# Altium PCB PCB1.PcbDoc
Units mil, origin at the board's own origin, x right, y up, seen from the top; angles counter-clockwise.
Board outline 4000 x 3524 mil, 2 copper layers (Top Layer, Bottom Layer); 94 components, 52 nets, 245 pads, 42 vias.
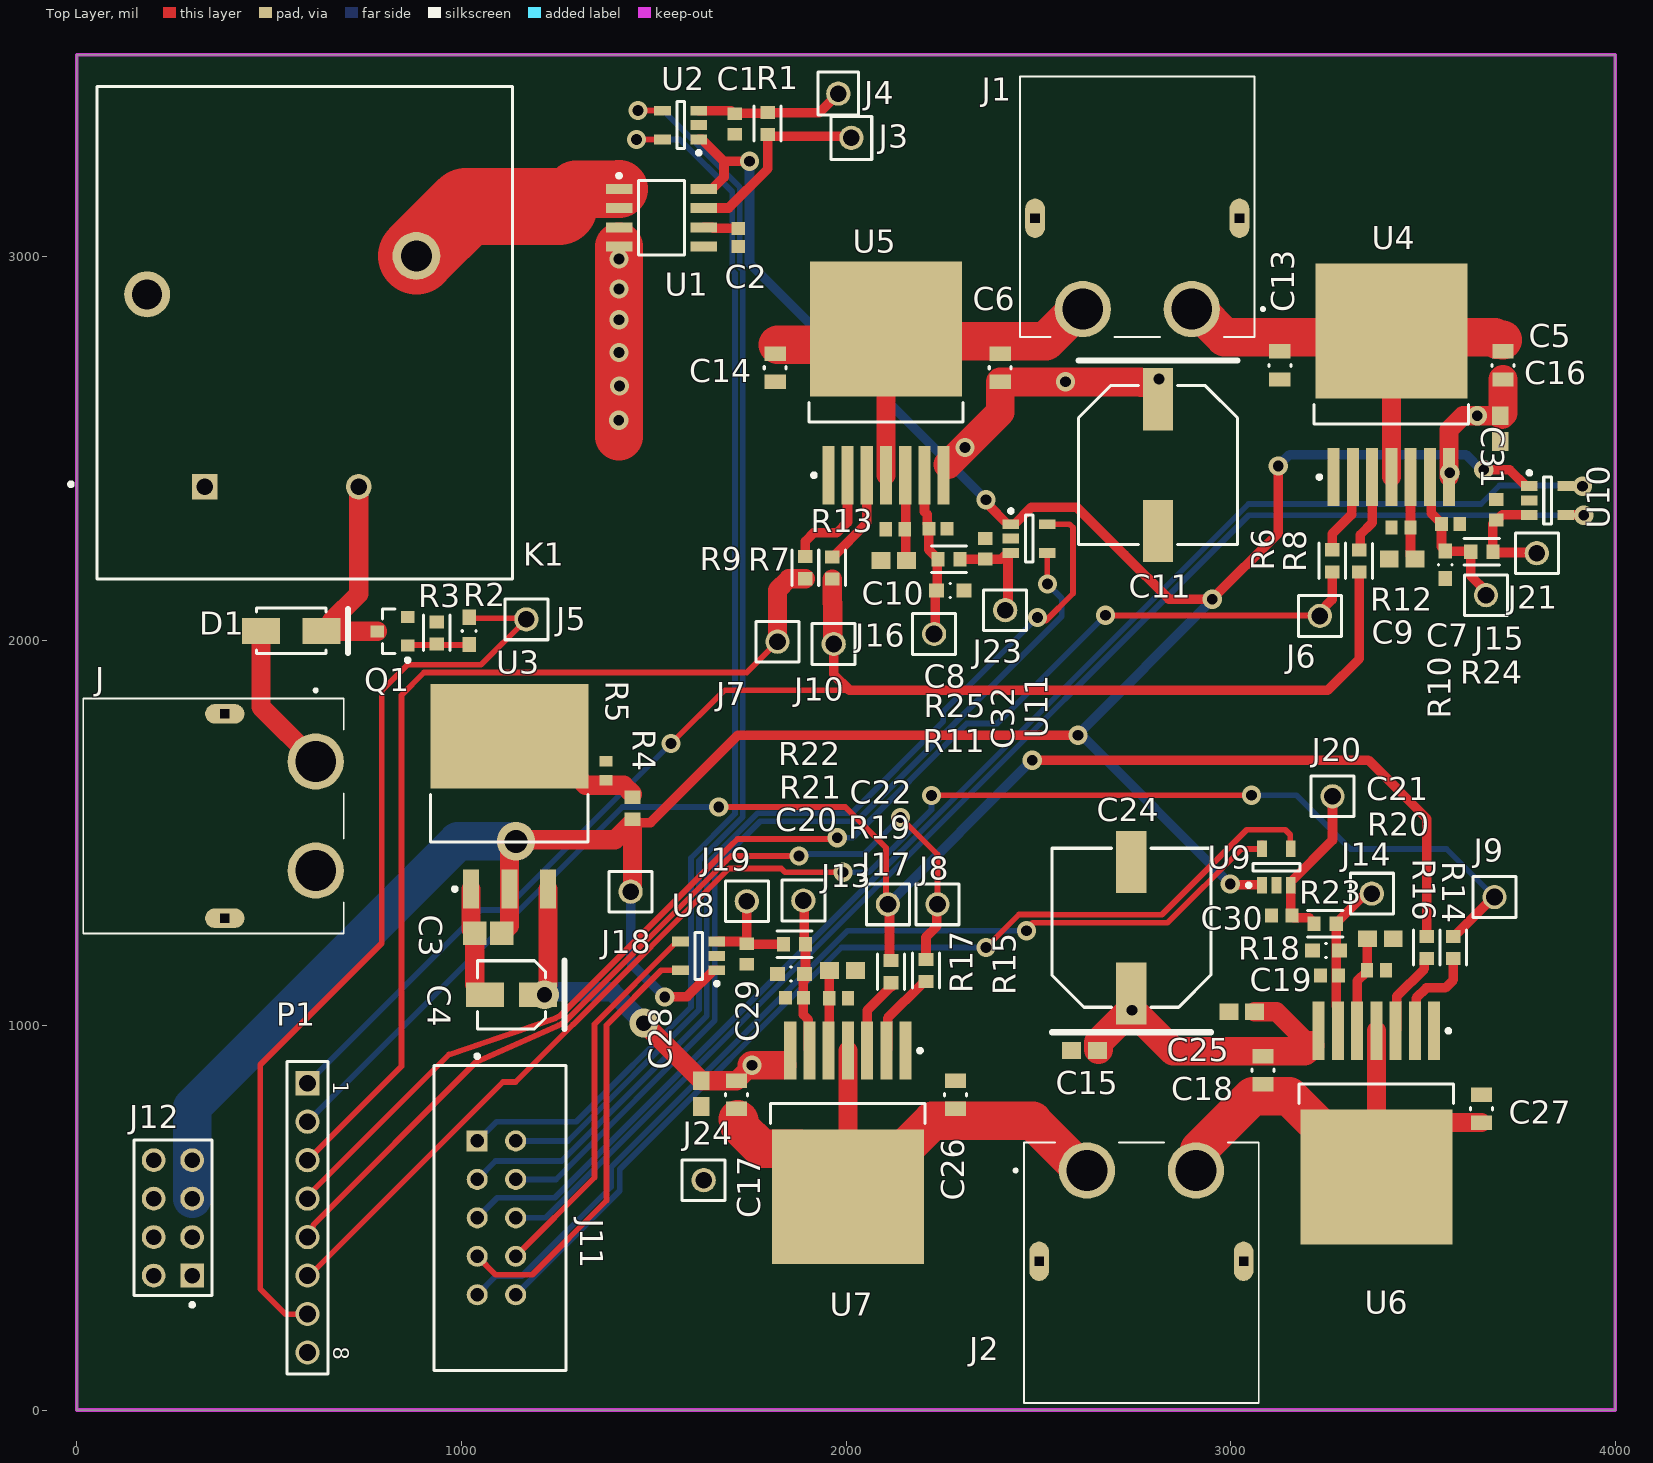
[diagram p0: Top Layer view]
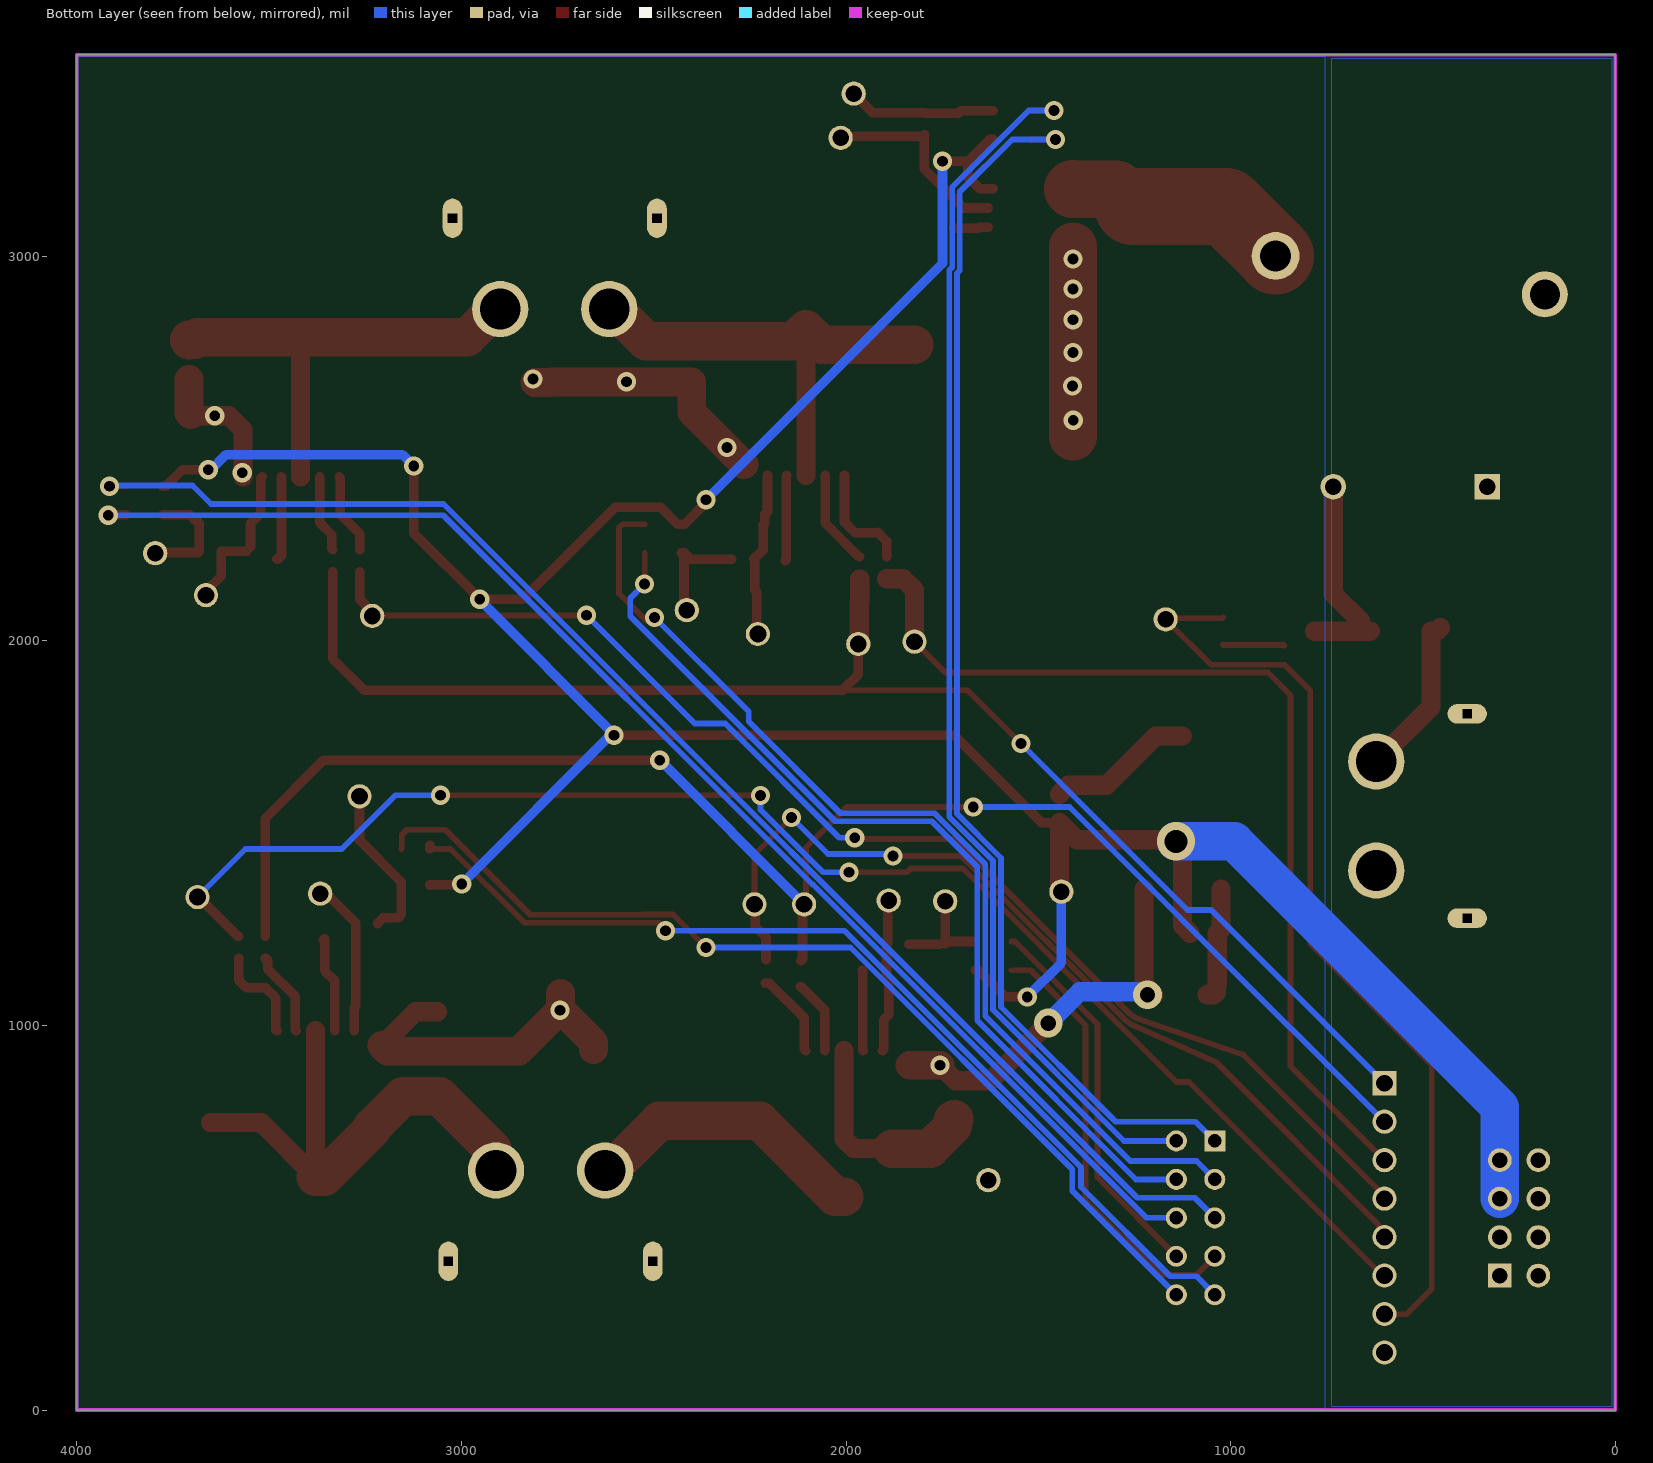
[diagram p1: Bottom Layer view, seen from below]

## Layer stack, top to bottom
Top Solder: solder mask 0.4, Solder Resist, Dk 3.5
Top Layer: signal copper 1.4
Dielectric 1: dielectric 12.6, FR-4, Dk 4.8
Bottom Layer: signal copper 1.4
Bottom Solder: solder mask 0.4, Solder Resist, Dk 3.5

## Board outline
0,0 0,3524 4000,3524 4000,0

## Design rules (kind name [scope] priority, off if disabled: settings)
Clearance [All] p1: gap=5 ignorepadtopadclearanceinfootprint=FALSE except(0: Arc-Hole Track-Hole SMDPad-Hole THPad-Hole Via-Hole Fill-Hole Poly-Hole Region-Hole Text-Hole; 7.87: Arc-SMDPad Track-SMDPad; 10: Arc-Via Track-Via Via-Via; 13: Arc-THPad Track-THPad; 21.26: SMDPad-THPad THPad-THPad)
HoleSize [All] p1: absolutevalues=TRUE maxlimit=248.03 minlimit=7.87 maxpercent=80.000 minpercent=20.000
HoleToHoleClearance [All] p1: gap=21.26 allowstackedmicrovias=TRUE
MinimumAnnularRing [All] p1: minimumring=5.12
PolygonConnect [All] p1: connectstyle=Relief reliefconductorwidth=10 reliefentries=4 polygonreliefangle="90 Angle" airgapwidth=10
RoutingVias [All] p1: holewidth=28 width=50 viastyle="Through Hole" minholewidth=11.81 minwidth=23.62 maxholewidth=250 maxwidth=250
SolderMaskExpansion [All] p1: expansion=4 istentingtop=FALSE
Width [All] p1: maxlimit=200 minlimit=10 preferedwidth=15 minimp=50.000000 maximp=50.000000 favimp=50.000000
28 further rules are at their usual default settings.

## Components (designator, comment, footprint, x,y, rotation, side; value= is the part's Value field where it differs from the comment)
C1 "GRM188R60J106ME47D" CAPC1608X90X35NL10T15 1711,3344 r90 top
C2 "1nF" CAPC1608X95X40LL15T15 1720,3049 r90 top
C3 "TAJP106M010RNJ" CAPC2113X120X50ML20T30 1070,1239.87 r0 top
C4 "EEE-FK1V100UR" PNSC-FK-V-B_V 1130,1079.87 r180 top
C5 "CC0805KRX7R7BB224" FP-CC0805-0_85-MFG 3708,2716.24 r90 top value="220 nF"
C6 "CC0805KRX7R7BB224" FP-CC0805-0_85-MFG 2401,2710 r90 top value="220 nF"
C7 "1nF" CAPC1608X95X40LL15T15 3572,2304 r180 top
C8 "1nF" CAPC1608X95X40LL15T15 2239,2292 r180 top
C9 "0603YC104KAZ2A" CAPC1608X90X35ML15T15 3446,2213 r0 top
C10 "0603YC104KAZ2A" CAPC1608X90X35ML15T15 2124,2209 r0 top
C11 "EEEFP1E471AP" PNSC-FP-V-G_V 2811,2457 r270 top
C13 "CC0805KRX7R7BB224" FP-CC0805-0_85-MFG 3128,2716.24 r270 top value="220 nF"
C14 "CC0805KRX7R7BB224" FP-CC0805-0_85-MFG 1816,2710 r270 top value="220 nF"
C15 "0603YC104KAZ2A" CAPC1608X90X35ML15T15 2620,935 r180 top
C16 "0603YC104KAZ2A" CAPC1608X90X35ML15T15 3701,2552 r270 top
C17 "CC0805KRX7R7BB224" FP-CC0805-0_85-MFG 1715,819.76 r270 top value="220 nF"
C18 "CC0805KRX7R7BB224" FP-CC0805-0_85-MFG 3084,884 r270 top value="220 nF"
C19 "1nF" CAPC1608X95X40LL15T15 3257,1130 r0 top
C20 "1nF" CAPC1608X95X40LL15T15 1866,1072 r0 top
C21 "0603YC104KAZ2A" CAPC1608X90X35ML15T15 3389.46,1226 r180 top
C22 "0603YC104KAZ2A" CAPC1608X90X35ML15T15 1991,1143 r180 top
C24 "EEEFP1E471AP" PNSC-FP-V-G_V 2742,1254.26 r90 top
C25 "0603YC104KAZ2A" CAPC1608X90X35ML15T15 3029,1036 r180 top
C26 "CC0805KRX7R7BB224" FP-CC0805-0_85-MFG 2285,819.76 r90 top value="220 nF"
C27 "CC0805KRX7R7BB224" FP-CC0805-0_85-MFG 3652,784 r90 top value="220 nF"
C28 "0603YC104KAZ2A" CAPC1608X90X35ML15T15 1624,823 r270 top
C29 "GRM188R60J106ME47D" CAPC1608X90X35NL10T15 1742,1186 r90 top
C30 "GRM188R60J106ME47D" CAPC1608X90X35NL10T15 3133,1286 r0 top
C31 "GRM188R60J106ME47D" CAPC1608X90X35NL10T15 3691,2341 r270 top
C32 "GRM188R60J106ME47D" CAPC1608X90X35NL10T15 2362,2240 r270 top
D1 "B160-13-F" DIOD-B1X0-2_V 558,2026 r0 top
J "XT60PW-F" AMASS_XT60PW-F 621.22,1544.75 r270 top
J1 "XT60PW-F" AMASS_XT60PW-F 2757.25,2862.78 r180 top
J2 "XT60PW-F" AMASS_XT60PW-F 2768,623.22 r0 top
J3 "61300111121" 61300111121 2014,3308 r90 top
J4 "61300111121" 61300111121 1980,3423 r90 top
J5 "61300111121" 61300111121 1169,2056 r0 top
J6 "61300111121" 61300111121 3232,2065 r0 top
J7 "61300111121" 61300111121 1822,1998 r0 top
J8 "61300111121" 61300111121 2238,1315 r0 top
J9 "61300111121" 61300111121 3686,1334 r0 top
J10 "61300111121" 61300111121 1968,1992 r0 top
J11 "D2510-6002-AR" FP-D2510-6002-AR-MFG 1100,500 r270 top
J12 "HTSW-104-07-G-D" FP-HTSW-104-07-G-D-MFG 250,500 r90 top
J13 "61300111121" 61300111121 1889,1325 r0 top
J14 "61300111121" 61300111121 3367,1343 r0 top
J15 "61300111121" 61300111121 3664,2119 r0 top
J16 "61300111121" 61300111121 2229,2018 r0 top
J17 "61300111121" 61300111121 2109,1315 r0 top
J18 "61300111121" 61300111121 1440,1348 r0 top
J19 "61300111121" 61300111121 1742,1323 r0 top
J20 "61300111121" 61300111121 3265,1596 r0 top
J21 "61300111121" 61300111121 3796,2228 r0 top
J23 "61300111121" 61300111121 2414,2080 r0 top
J24 "61300111121" 61300111121 1630,598 r0 top
K1 "T9AS1D22-12" FP-T9AS1D22-12-MFG 593.04,2801.2 r0 top
P1 "61300811121" 61300811121 600,500 r270 top
Q1 "MMBT2222ALT1G" ONSC-SOT-23-3-318-08_V 821,2025 r180 top
R1 "MCT0603MD1002BP100" FP-MCT0603-IPC_B 1796,3345 r90 top
R2 "RP73PF1J1K0BTDF" FP-RP73P-1J-MFG 1020,2026 r270 top value=1KΩ
R3 "MCT0603MD1002BP100" FP-MCT0603-IPC_B 936,2021 r270 top
R4 "ERJ-3EKF1210V" RESC1608X55X30ML15T15 1445,1564.87 r270 top
R5 "365 ohm" RESC1608X55X30LL15T15 1376.1,1662.87 r270 top
R6 "MCT0603MD1002BP100" FP-MCT0603-IPC_B 3264,2208.28 r90 top
R7 "MCT0603MD1002BP100" FP-MCT0603-IPC_B 1894,2190.28 r90 top
R8 "MCT0603MD1002BP100" FP-MCT0603-IPC_B 3334,2208 r90 top
R9 "MCT0603MD1002BP100" FP-MCT0603-IPC_B 1964,2190 r90 top
R10 "RP73PF1J1K0BTDF" FP-RP73P-1J-MFG 3558,2198 r90 top value=1KΩ
R11 "RP73PF1J1K0BTDF" FP-RP73P-1J-MFG 2271,2131 r180 top value=1KΩ
R12 "CRCW0603510RFKEA" RESC1609X50X30NL10T20 3443,2295 r0 top
R13 "CRCW0603510RFKEA" RESC1609X50X30NL10T20 2128,2290 r0 top
R14 "MCT0603MD1002BP100" FP-MCT0603-IPC_B 3579,1203 r270 top
R15 "MCT0603MD1002BP100" FP-MCT0603-IPC_B 2208,1143 r270 top
R16 "MCT0603MD1002BP100" FP-MCT0603-IPC_B 3510,1203 r270 top
R17 "MCT0603MD1002BP100" FP-MCT0603-IPC_B 2117,1140 r270 top
R18 "RP73PF1J1K0BTDF" FP-RP73P-1J-MFG 3248,1195 r0 top value=1KΩ
R19 "CRCW0603510RFKEA" RESC1609X50X30NL10T20 1981,1071 r180 top
R20 "CRCW0603510RFKEA" RESC1609X50X30NL10T20 3379,1144 r180 top
R21 "RP73PF1J1K0BTDF" FP-RP73P-1J-MFG 1857,1134 r0 top value=1KΩ
R22 "MCT0603MD1002BP100" FP-MCT0603-IPC_B 1866,1211 r180 top
R23 "MCT0603MD1002BP100" FP-MCT0603-IPC_B 3246,1265 r180 top
R24 "MCT0603MD1002BP100" FP-MCT0603-IPC_B 3653,2232 r0 top
R25 "MCT0603MD1002BP100" FP-MCT0603-IPC_B 2268,2212 r0 top
U1 "ACS712ELCTR-30A-T" ALEG-LC-8_V 1520.04,3100.2 r270 top
U2 "MCP3221A7T-E/OT" SOT-23-OT5_N 1570,3341 r180 top
U3 "LM1084IS-5.0/NOPB" KTT0003B_L 1125,1597 r90 top
U4 "BTN8962TA" INF-PG-TO263-7-1_N 3418,2666.24 r90 top
U5 "BTN8962TA" INF-PG-TO263-7-1_N 2104,2671 r90 top
U6 "BTN8962TA" INF-PG-TO263-7-1_N 3379,746 r270 top
U7 "BTN8962TA" INF-PG-TO263-7-1_N 2005,694.76 r270 top
U8 "MCP3221A7T-E/OT" SOT-23-OT5_N 1617,1181 r180 top
U9 "MCP3221A7T-E/OT" SOT-23-OT5_N 3119,1412 r90 top
U10 "MCP3221A7T-E/OT" SOT-23-OT5_N 3824,2365 r0 top
U11 "MCP3221A7T-E/OT" SOT-23-OT5_N 2476,2266 r0 top

## Footprints (in the part's own frame and the unit in brackets; to place one, negate y for a bottom-side part, rotate by r counter-clockwise, add the part's x,y. Pads: shape width x height; smd on the part's side, far side on the other; paste and mask are expansions set on the pad)
61300111121 [mm] "Pin Header, pitch 2.54 mm, THT, Vertical, single row, 1p"
  round 1.6 hole 1.1: 1(0,0)
  silkscreen extent -1.42,-1.35 1.42,1.35, body extent -1.27,-1.27 1.27,1.27, height 8.57
61300811121 [mm] "Pin Header, pitch 2.54 mm, THT, Vertical, single row, 8p"
  rect 1.6x1.6 hole 1.1: 1(-8.89,0)
  round 1.6 hole 1.1: 2(-6.35,0) 3(-3.81,0) 4(-1.27,0) 5(1.27,0) 6(3.81,0) 7(6.35,0) 8(8.89,0)
  silkscreen extent -10.31,-1.35 10.31,1.35, body extent -10.16,-1.27 10.16,1.27, height 8.57
ALEG-LC-8_V [mm] "SOIC, 8-Leads, Body 4.9x3.9mm, Pitch 1.27mm"
  rect 0.65x1.75 smd: 1(-1.905,-2.8) 2(-0.635,-2.8) 3(0.635,-2.8) 4(1.905,-2.8) 5(1.905,2.8) 6(0.635,2.8) 7(-0.635,2.8) 8(-1.905,2.8)
  silkscreen extent -2.9,-2.92 2.45,1.53, body extent -2.45,-1.95 2.45,1.95, height 1.75
AMASS_XT60PW-F [mm]
  round 3.716 hole 2.7: 1(-3.6,0) 2(3.6,0)
  oval 1.3x2.6 hole 0.6 square: S1(-6.75,-6) S2(6.75,-6)
  silkscreen extent -8.4,-15.35 7.75,1.85
CAPC1608X90X35ML15T15 [mm] "Chip Capacitor, 2-Leads, Body 1.60x0.81mm, IPC Low Density"
  rect 1.25x1.1 smd: 1(-0.85,0) 2(0.85,0)
  body extent -0.88,-0.48 0.87,0.48, height 0.9
CAPC1608X90X35NL10T15 [mm] "Chip Capacitor, 2-Leads, Body 1.60x0.80mm, IPC Medium Density"
  rect 0.85x0.95 smd: 1(-0.675,0) 2(0.675,0)
  body extent -0.85,-0.45 0.85,0.45, height 0.9
CAPC1608X95X40LL15T15 [mm] "Chip Capacitor, 2-Leads, Body 1.60x0.80mm, IPC High Density"
  rect 0.85x0.9 smd: 1(-0.6,0) 2(0.6,0)
  body extent -0.87,-0.48 0.88,0.48, height 0.95
CAPC2113X120X50ML20T30 [mm] "Chip Capacitor, 2-Leads, Body 2.05x1.25mm, IPC Low Density"
  rect 1.55x1.55 smd: 1(-0.9,0) 2(0.9,0)
  body extent -1.13,-0.72 1.12,0.72, height 1.2
DIOD-B1X0-2_V [mm] "Molded Diode, 2-Leads, Body 4.6x2.92mm"
  rect 2.5x1.7 smd: 1(-2,0) 2(2,0)
  silkscreen extent -2.3,-1.5 3.75,1.5, body extent -2.3,-1.46 2.3,1.46, height 2.3
FP-CC0805-0_85-MFG [mm]
  rect 0.95x1.4 smd paste+0 mask+0: 1(-0.925,0) 2(0.925,0)
  silkscreen extent -0.08,-0.72 0.08,0.72, body extent -1.6,-1.05 1.6,1.05, height 0.25
FP-D2510-6002-AR-MFG [mm]
  rect 1.39x1.39 hole 0.89 paste-1000 mask+0: 1(-5.08,-1.495)
  round 1.39 hole 0.89 paste-1000 mask+0: 2(-5.08,1.045) 3(-2.54,-1.495) 4(-2.54,1.045) 5(0,-1.495) 6(0,1.045) 7(2.54,-1.495) 8(2.54,1.045) 9(5.08,-1.495) 10(5.08,1.045)
  silkscreen extent -10.8,-4.36 10.07,4.36, body extent -10.18,-4.46 10.18,4.46, height 0.25
FP-HTSW-104-07-G-D-MFG [mm]
  rect 1.57x1.57 hole 1.02 paste-1000 mask+0: 1(-3.81,-1.27)
  round 1.57 hole 1.02 paste-1000 mask+0: 2(-3.81,1.27) 3(-1.27,-1.27) 4(-1.27,1.27) 5(1.27,-1.27) 6(1.27,1.27) 7(3.81,-1.27) 8(3.81,1.27)
  silkscreen extent -5.87,-2.58 5.14,2.58, body extent -5.24,-2.68 5.24,2.68, height 0.25
FP-MCT0603-IPC_B [mil]
  rect 34x37.88 smd paste+0 mask+0: 1(-28.72,0) 2(28.72,0)
  silkscreen extent -46,-35 46,35, body extent -56,-29 56,29, height 10
FP-RP73P-1J-MFG [mm]
  rect 1x0.9 smd paste+0 mask+0: 1(-0.9,0) 2(0.9,0)
  silkscreen extent -0.03,-0.45 0.03,0.45, body extent -1.5,-0.55 1.5,0.55, height 0.25
FP-T9AS1D22-12-MFG [mm]
  rect 1.69x1.69 hole 1.09 paste-1000 mask+0: A1(-6.605,-10.165)
  round 1.69 hole 1.09 paste-1000 mask+0: A2(3.555,-10.165)
  round 3.16 hole 2.06 paste-1000 mask+0: B1(7.365,5.075)
  round 3.03 hole 1.98 paste-1000 mask+0: B2(-10.415,2.535)
  silkscreen extent -15.57,-16.25 13.71,16.25, body extent -13.81,-16.35 13.81,16.35, height 0.25
INF-PG-TO263-7-1_N [mm] "DPAK, 8-Leads, Body 10x9.25mm, Pitch 1.27mm, IPC Medium Density"
  rect 3.85x0.8 smd: 1(-6.1,3.81) 2(-6.1,2.54) 3(-6.1,1.27) 4(-6.1,0) 5(-6.1,-1.27) 6(-6.1,-2.54) 7(-6.1,-3.81)
  rect 8.9x10.05 smd: 8(3.55,0)
  silkscreen extent -6.22,-5.1 -1.3,5.1, body extent -2.6,-5.1 6.85,5.1, height 4.4
KTT0003B_L [mm] "D2-PAK, 3-Leads, Body 10.41x8.89mm, Pitch 2.54mm, IPC High Density"
  rect 2.55x1.05 smd: 1(-6.15,2.54) 2(-6.15,0) 3(-6.15,-2.54)
  rect 6.9x10.45 smd: 4(3.95,0)
  silkscreen extent -6.27,-5.2 0.1,5.2, body extent -6.83,-5.2 7.52,5.2, height 4.64
ONSC-SOT-23-3-318-08_V [mm] "SOT23, 3-Leads, Body 2.92x1.3mm, Pitch 0.95mm"
  rect 0.9x0.8 smd: 1(-1,0.95) 2(-1,-0.95) 3(1,0)
  silkscreen extent -1.13,-1.46 0.65,2.02, body extent -0.65,-1.46 0.65,1.46, height 1.11
PNSC-FK-V-B_V [mm] "CAPAE, 2-Leads, Body 4.50x4.50mm"
  rect 2.5x1.6 smd: 1(-1.75,0) 2(1.75,0)
  silkscreen extent -3.5,-2.25 2.25,2.25, body extent -2.75,-2.25 2.75,2.25, height 6.1
PNSC-FP-V-G_V [mm] "CAPAE, 2-Leads, Body 10.50x10.50mm"
  rect 4.1x2 smd: 1(-4.35,0) 2(4.35,0)
  silkscreen extent -6.9,-5.25 5.25,5.25, body extent -6,-5.25 6,5.25, height 10.5
RESC1608X55X30LL15T15 [mm] "Chip Resistor, 2-Leads, Body 1.60x0.80mm, IPC High Density"
  rect 0.7x0.85 smd: 1(-0.625,0) 2(0.625,0)
  body extent -0.87,-0.48 0.87,0.48, height 0.55
RESC1608X55X30ML15T15 [mm] "Chip Resistor, 2-Leads, Body 1.60x0.80mm, IPC Low Density"
  rect 0.9x1.05 smd: 1(-0.725,0) 2(0.725,0)
  body extent -0.87,-0.48 0.87,0.48, height 0.55
RESC1609X50X30NL10T20 [mm] "Chip Resistor, 2-Leads, Body 1.55x0.85mm, IPC Medium Density"
  rect 0.8x0.95 smd: 1(-0.625,0) 2(0.625,0)
  body extent -0.82,-0.48 0.82,0.48, height 0.5
SOT-23-OT5_N [mm] "SOT23, 5-Leads, Body 2.9x1.7mm, Pitch 0.95mm, Lead Span 2.8mm, IPC Medium Density"
  rect 1.1x0.65 smd: 1(-1.2,0.95) 2(-1.2,0) 3(-1.2,-0.95) 4(1.2,-0.95) 5(1.2,0.95)
  silkscreen extent -1.33,-1.55 0.25,1.95, body extent -0.9,-1.55 0.9,1.55, height 1.45

## Part data
C1 C29 C30 C31 C32: library part CMP-2006-02792-1, Manufacturer=Murata, Part Number=GRM188R60J106ME47D
C2 C7 C8 C19 C20: library part CMP-2006-02121-1, Manufacturer=Vitramon, Part Number=VJ0603Y102KXACW1BC
C3: library part CMP-2007-04028-1, Manufacturer="AVX Interconnect / Elco", Part Number=TAJP106M010RNJ
C4: library part CMP-2000-06211-1, "Aluminum Electrolytic Capacitor, 10 uF, +/- 20%, 35 V, 2-Pin SMD (Size Code B), -55 to 105 degC, RoHS, Tape and Reel", Capacitance=10µF, Case Size/Dimension=Ø4x5.8mm, Lifetime@Temperature=2000Hrs@105°C, Manufacturer=Panasonic, Operating Temp Range=-55to+105°C, Operating Temp-Max=105°C, Package Description="2-Pin Electrolytic Aluminum Capacitor, Body 4.3 x 4.3 mm", Package Reference=FK-V-B, Rated Voltage=35V, Ripple Current=90mA, Datasheet URL=http://industrial.panasonic.com/cdbs/www-data/pdf/RDE0000/ABA0000C1181.pdf, Datasheet Version=03/2016, Impedance=1.35O, Manufacturer URL=http://www.panasonic.com/, Mounting Technology=SurfaceMount, Package URL=http://industrial.panasonic.com/cdbs/www-data/pdf/RDE0000/DME0000COL48.pdf, Series=FK, Type=Can
C5 C6 C13 C14 C17 C18 C26 C27: library part CMP-03422-000685-1, "CAP CER 0.22UF 16V X7R 0805", Capacitance="220 nF", Manufacturer=Yageo, Package=CC0805-0.85, Temperature="-30°C to +85°C", Temperature Characteristic=X7R, Temperature Range High=+85°C, Temperature Range Low=-30°C, Tolerance=0.1, Voltage Rating="16 V", Automotive=No, Category=Cap, ComponentLink2Description=Datasheet, ComponentLink2URL=http://www.yageo.com/documents/recent/UPY-GPHC_Y5V_6.3V-to-50V_8.pdf, Device Class L1="Passive Components", Device Class L2=Capacitors, Device Class L3="Ceramic Capacitors", Digikey Description="CAP CER 0.22UF 16V X7R 0805", Footprint Url=http://www.yageo.com/exep/pages/download/literatures/UPY-C_GEN_24.pdf, Height=0.95mm, Ipc Land Pattern Name=CAPC200125X85, Lead Free=Yes, Manufacturer Part Number=CC0805KRX7R7BB224, Material=Ceramic, Mouser Description="Multilayer Ceramic Capacitors MLCC - SMD/SMT 220nF 16V X7R 10%", Octopart=https://octopart.com/cc0805krx7r7bb224-yageo-8376564, RoHS=TRUE
C9 C10 C15 C16 C21 C22 C25 C28: library part CMP-2006-04496-1, Manufacturer="AVX Interconnect / Elco", Part Number=0603YC104KAZ2A
C11 C24: library part CMP-2000-06214-1, "Aluminum Electrolytic Capacitor, 470 uF, +/- 20%, 25 V, 2-Pin SMD (Size Code G), -55 to 105 degC, RoHS, Tape and Reel", Capacitance=470µF, Case Size/Dimension=Ø10x10.2mm, ESR (Equivalent Series Resistance)=0.06O, Lifetime@Temperature=2000Hrs@105°C, Manufacturer=Panasonic, Operating Temp Range=-55to+105°C, Operating Temp-Max=105°C, Package Description="2-Pin Electrolytic Aluminum Capacitor, Body 10.3 x 10.3 mm", Package Reference=FP-V-G, Rated Voltage=25V, Ripple Current=1190mA, Datasheet URL=http://industrial.panasonic.com/cdbs/www-data/pdf/RDE0000/ABA0000C1184.pdf, Datasheet Version=03/2016, Manufacturer URL=http://www.panasonic.com/, Mounting Technology=SurfaceMount, Package URL=http://industrial.panasonic.com/cdbs/www-data/pdf/RDE0000/DME0000COL48.pdf, Series=FP, Type=Can
D1: library part CMP-2000-05885-1, "Surface Mount Schottky Barrier Rectifier, 1 A, -65 to 150 degC, 2-Pin SMA, RoHS, Tape and Reel", If - Forward Current=1A, Ifsm - Forward Surge Current=30A, Ir - Reverse Current=500uA, Manufacturer=DiodesIncorporated, Maximum Operating Temperature=+150C, Minimum Operating Temperature=-65C, Operating Temperature Range=-65Cto+150C, Package / Case=SMA, Package Description="2-Pin Surface Mount Device, Body 4.3 x 2.605 mm", Vf - Forward Voltage=0.7V, Vrrm - Repetitive Reverse Voltage=60V, Brand=DiodesIncorporated, Configuration=Single, Datasheet URL=http://www.diodes.com/_files/datasheets/ds13002.pdf, Datasheet Version="Rev. 18-2, 05/2013", Factory Pack Quantity=5000, Height=2.1mm, IFSM Max=30A, IO=1A, Length=4.6mm, Manufacturer URL=http://www.diodes.com/, Mounting Style=SMD/SMT, Mounting Technology=SurfaceMount, Package Reference=SMA, Packaging=Reel, Product=SchottkyDiodes, Product Category=SchottkyDiodes&Rectifiers, RoHS=True, Series=B160, Technology=Si, Termination Style=SMD/SMT, Type=SchottkyBarrierRectifier, Unit Weight=0.002258oz, VRRM Max=60V, Width=2.92mm
J J1 J2: "Socket DC Supply Connector Female", Package=Package, Availability=Unavailable, BuyPart=https://www.snapeda.com/parts/XT60PW-F/AMASS/view-part/2890674/?ref=eda, MF=AMASS, MP=XT60PW-F, Price=None, SnapEDA_Link=https://www.snapeda.com/parts/XT60PW-F/AMASS/view-part/2890674/?ref=snap
J3 J4 J5 J6 J7 J8 J9 J10 J13 J14 J15 J16 J17 J18 J19 J20 J21 J23 J24: library part CMP-1502-01058-1, "THT Vertical Pin Header WR-PHD, Pitch 2.54 mm, Single Row, 1 pins", Contact Resistance=20mOhm, Manufacturer="Wurth Elektronik", Operating Temperature=-40to105degC, Rated Current=3A, Withstanding Voltage=500VAC, Working Voltage=250VAC, Datasheet URL=https://katalog.we-online.de/em/datasheet/6130xx11121.pdf, Gender=Male, Manufacturer URL=http://www.we-online.de, Mounting Technology=THT, Orientation=Vertical, Package Reference=61300111121, Packaging=Bag, Part Number=61300111121, Pin Number=1, Pitch=2.54mm, Publisher=WurthElektronik, Row Number=Single
J11: library part CMP-05379-000002-1, "CONN HEADER VERT 10POS 2.54MM", Current Rating=1.75A, Manufacturer=3M, Temperature="-55°C to +105°C", Temperature Range High=+105°C, Temperature Range Low=-55°C, Automotive=No, Category=Conn, ComponentLink2Description=Datasheet, ComponentLink2URL=http://multimedia.3m.com/mws/media/485877O/3m-four-wall-header-d2500-series-ts-2244.pdf, Conn Gender=Male, Conn Orientation=Straight, Contact Material=Gold,Nickel, Device Class L1=Connectors, Device Class L2="Headers and Wire Housings", Device Class L3=unset, Digikey Description="CONN HEADER VERT 10POS 2.54MM", Height=10.04mm, Lead Free=Yes, Manufacturer Part Number=D2510-6002-AR, Mouser Description="Headers & Wire Housings 10P 4WALL HEADER STRT L-PRO THRU-HOLE", Number Of Contacts=10, Number Of Rows=2, Octopart=https://octopart.com/d2510-6002-ar-3m-8399032, Package=D2510-6002-AR, Pitch=2.54mm, RoHS=TRUE
J12: library part CMP-02766-000066-1, "CONN HEADER VERT 8POS 2.54MM", Current Rating=6.3A, Manufacturer=Samtec, Temperature="-55°C to +125°C", Temperature Range High=+125°C, Temperature Range Low=-55°C, Voltage Rating=550V, Automotive=No, Category=Conn, ComponentLink2Description=Datasheet, ComponentLink2URL=http://suddendocs.samtec.com/prints/htsw-xxx-xx-xxx-x-xx-xx-xx-mkt.pdf, Conn Gender=Male, Conn Orientation=Straight, Contact Material=Gold,Nickel, Device Class L1=Connectors, Device Class L2="Headers and Wire Housings", Device Class L3=unset, Digikey Description="CONN HEADER VERT 8POS 2.54MM", Footprint Url=http://suddendocs.samtec.com/prints/htsw-xxx-xx-xxx-x-xx-xx-xx-footprint.pdf, Height=8.71mm, Lead Free=Yes, Manufacturer Part Number=HTSW-104-07-G-D, Number Of Contacts=8, Number Of Rows=2, Octopart=https://octopart.com/htsw-104-07-g-d-samtec-10613822, Package=HTSW-104-07-G-D, Pitch=2.54mm, RoHS=TRUE
K1: library part CMP-03395-000121-1, "RELAY GEN PURPOSE SPST 30A 12V", Ambient Temperature Range High=+85°C, Ambient Temperature Range Low=-55°C, Coil Power=1W, Coil Resistance=144Ω, Coil Voltage=12V, Current Rating=30A, Manufacturer="TE Connectivity", Temperature="-55°C to +105°C", Temperature Range High=+105°C, Automotive=No, Category=Relay, Coil Type=Non-Latching, ComponentLink2Description=Datasheet, ComponentLink2URL=https://www.te.com/commerce/DocumentDelivery/DDEController?Action=showdoc&DocId=Customer+Drawing%7FT9AS1D22-12%7FG%7Fpdf%7FEnglish%7FENG_CD_T9AS1D22-12_G.pdf%7F1-1419104-7, Device Class L1=Electromechanical, Device Class L2=Relays, Device Class L3="Power Relays", Digikey Description="RELAY GEN PURPOSE SPST 30A 12V", Height=27.94mm, Lead Free=Yes, Manufacturer Part Number=T9AS1D22-12, Number Of Contacts=1, Octopart=https://octopart.com/t9as1d22-12-te+connectivity-46521723, Package=T9AS1D22-12, RoHS=TRUE, Switching Current=30A, Temperature Range Low=-55°C, Throw Configuration=SPST
P1: library part CMP-1502-01076-1, "THT Vertical Pin Header WR-PHD, Pitch 2.54 mm, Single Row, 8 pins", Contact Resistance=20mOhm, Manufacturer="Wurth Elektronik", Operating Temperature=-40to105degC, Rated Current=3A, Withstanding Voltage=500VAC, Working Voltage=250VAC, Datasheet URL=https://katalog.we-online.de/em/datasheet/6130xx11121.pdf, Gender=Male, Manufacturer URL=http://www.we-online.de, Mounting Technology=THT, Orientation=Vertical, Package Reference=61300811121, Packaging=Bag, Part Number=61300811121, Pin Number=8, Pitch=2.54mm, Publisher=WurthElektronik, Row Number=Single
Q1: library part CMP-1048-00538-1, "General Purpose Transistor, NPN Silicon, 3-Pin SOT-23, Pb-Free, Tape and Reel", Manufacturer="On Semiconductor", ComponentLink1Description="Manufacturer URL", ComponentLink1URL=http://www.onsemi.com/, ComponentLink2Description=Datasheet, ComponentLink2URL=http://www.onsemi.cn/pub_link/Collateral/MMBT2222LT1-D.PDF, ComponentLink3Description="Package Specification", ComponentLink3URL=http://www.onsemi.cn/pub_link/Collateral/318-08.PDF, DatasheetVersion="Rev. 10", fT Min (MHz)=300, IC Continuous (A)=0.6, Mounting Technology="Surface Mount", PackageDescription="3-Pin Small Outline Transistor, Body 2.92 x 1.3 mm, Pitch 0.95 mm", PackageReference=SOT-23-3-318-08, PackageVersion="Rev. AP, 11/2009", Packing="Tape and Reel", PartNumber=MMBT2222ALT1G, Polarity=NPN, RoHS=TRUE
R1 R3 R6 R7 R8 R9 R14 R15 R16 R17 R22 R23 R24 R25: library part CMP-02407-000530-1, "RES SMD 100 OHM 1% 1/8W 0603", Case Code (Imperial)=0603, Case Code (Metric)=1608, Max Operating Temperature=155°C, Max Power Dissipation=125mW, Min Operating Temperature=-55°C, Package Quantity=1, Resistance=10kR, Temperature Coefficient=25ppm/°C, Tolerance=0.1%, Voltage Rating=75V, Case/Package=0603, Composition="Thin Film", Contact Plating=Tin, Depth=0.85mm, Features="Automotive AEC-Q200", Height=0.45mm, Lead Free="Lead Free", Length=1.55mm, Military Standard=Not, Number of Terminations=2, Packaging="Tape and Reel", Power Rating=125mW, Radiation Hardening=No, REACH SVHC="No SVHC", Voltage Rating (DC)=75V, Width=0.033inch
R2 R10 R11 R18 R21: library part CMP-03211-004517-1, "RES SMD 1K OHM 0.1% 1/6W 0603", Manufacturer="TE Connectivity", Package=RP73P-1J, Power Rating=0.166W, Resistance=1KΩ, Temperature="-55°C to +155°C", Temperature Coefficient=25ppm/°C, Temperature Range High=+155°C, Temperature Range Low=-55°C, Tolerance=0.001, Voltage Rating=100V, Automotive=No, Category=Res, ComponentLink2Description=Datasheet, ComponentLink2URL=https://www.te.com/commerce/DocumentDelivery/DDEController?Action=srchrtrv&DocNm=1773272&DocType=DS&DocLang=English, Composition="Thin Film", Device Class L1="Passive Components", Device Class L2=Resistors, Device Class L3="Chip SMD Resistors", Digikey Description="RES SMD 1K OHM 0.1% 1/6W 0603", Height=0.55mm, Ipc Land Pattern Name=RESC15580X45, Lead Free=Yes, Manufacturer Part Number=RP73PF1J1K0BTDF, Octopart=https://octopart.com/rp73pf1j1k0btdf-te+connectivity-45465729, RoHS=TRUE, Series=RP73P
R4: library part CMP-2000-00218-1, Manufacturer=Panasonic, Part Number=ERJ-3EKF1210V
R5: library part CMP-2000-00461-1, Manufacturer=Panasonic, Part Number=ERJ-3EKF3650V
R12 R13 R19 R20: library part CMP-2000-03439-1, Manufacturer="Vishay Dale", Part Number=CRCW0603510RFKEA
U1: library part CMP-2000-04990-1, "Linear Current Sensor IC, 4.5 to 5.5 V Supply Voltage, 10 mA Supply Current, -40 to 85 degC, 8-Pin SOIC (LC), RoHS, Tape and Reel", Manufacturer="Allegro Microsystems", Operating Temperature Max=85degC, Operating Temperature Min=-40degC, Operating Temperature Range=-40degCto+85degC, Output Current=10mA, Package / Case=8-SOIC, Package Description="8-Pin Small Outline Integrated Circuit, Body 4.9 x 3.9 mm, Pitch 1.27 mm", Package Reference=LC-8, Sensor Case Style=SOIC, Supply Voltage Max=5V, Supply Voltage Min=4.5V, Bandwidth=80kHz, Datasheet URL=https://datasheet.ciiva.com/22693/1691042-22693349.pdf, Datasheet Version="Rev. 15, 11/2012", Hall Effect Type=Linear, Manufacturer URL=http://www.allegromicro.com/, MSL=MSL2-1year, No. of Pins=8, SVHC=NoSVHC(19-Dec-2012), Termination Type=SMD
U2 U8 U9 U10 U11: library part CMP-0188-00722-2, "Low Power 12-Bit A/D Converter With I2C Interface, 5-Pin SOT-23, Extended Temperature, Tape and Reel", Code_IPC=SOT23-5, ComponentLink1Description="Manufacturer URL", ComponentLink1URL=http://www.microchip.com/, ComponentLink2Description=Datasheet, ComponentLink2URL=http://ww1.microchip.com/downloads/en/DeviceDoc/21732c.pdf, ComponentLink3Description="Package Specification", ComponentLink3URL=http://www.microchip.com/stellent/groups/techpub_sg/documents/packagingspec/en012702.pdf, DatasheetVersion="revC, Jul-2006", PackageDescription="5-Lead Plastic Small Outline Transistor (OT) [SOT-23]", PackageReference=SOT-23-OT5, PackageVersion="revBB, Aug-2009", RevisionNote="URLs added."
U3: library part CMP-0062-00575-5, "5A Low Dropout Positive Regulators, 3-pin TO-263, Pb-Free", Manufacturer="Texas Instruments", PackageTopMarking=NSUZXYTTE#*LM1084*IS-5.0, PowerWise=N, Code_JEDEC=MO-169-AA, ComponentLink1Description="Datasheet URL", ComponentLink1URL=http://www.ti.com/general/docs/lit/getliterature.tsp?genericPartNumber=LM1084&fileType=pdf, CompType="LDO IC", High-Reliability=Y, PackageDescription="TO-263, Molded, .400 x .390 x .180in, 3 Lead, .1in Pitch, Surface Mount", PackageReference=KTT0003B, PartNumber=LM1084IS-5.0/NOPB, PinCount=3, RoHS=Y
U4 U5 U6 U7: library part CMP-1114-00015-1, "High Current PN Half Bridge, 5.5 to 40 V, 7 uA Iq, PG-TO263-7, Reel, Green", Manufacturer=Infineon, Operating Range="5.5 to 40 V", ComponentLink1Description="Manufacturer URL", ComponentLink1URL=http://www.infineon.com/, ComponentLink2Description=Datasheet, ComponentLink2URL=http://www.infineon.com/dgdl/BTN8962TA-Data-Sheet-rev10-Infineon.pdf?folderId=db3a30431ff98815012060aedcd46179&fileId=db3a30433fa9412f013fbe2d247a7bf5, ComponentLink3Description="Package Specification", ComponentLink3URL=http://www.infineon.com/dgdl/BTN8982TA-Data-Sheet-rev10-Infineon.pdf?folderId=db3a30431ff98815012060aedcd46179&fileId=db3a30433fa9412f013fbe32289b7c17&ack=t, DatasheetVersion="Rev. 1.0", Diagnosis="OT, OC-failure flag, current sense", Green=TRUE, Group=NovalithIC, Halogen-free=TRUE, ID(lim)="42 A", ID(lim) (min)="30 A", Inhibit=TRUE, Iq (typ)="7 uA", Mounting=SMT, Mounting Technology="Surface Mount", PackageDescription="7-Pin Plastic (Green) Transistor Single Outline Package, 9.25 x 10 mm Body, 1.27 mm Pitch", PackageReference=PG-TO263-7-1, PackageVersion=May-07, Packing=Reel, PartNumber=BTN8962TA, Protect="UV, OT, OC", RDS (on)=14.2

## Via types
v1: diameter 50, hole 28, Top Layer to Bottom Layer, 39 vias
v2: diameter 75, hole 40, Top Layer to Bottom Layer, 2 vias
v3: diameter 100, hole 60, Top Layer to Bottom Layer, 1 vias

## Nets (pads, with @x,y where several pads share a name; then routed paths per layer and width w, separated by ;. In a path a pad name is that pad's centre, name@x,y a point inside that pad or via, vN(x,y) a via of type N, cw(c..) or ccw(c..) an arc to the next point about the centre after c; other vN are vias at no path point)
+5: C3.2 J12.5 J12.7 J18.1 R4.2 U1.8 U2.1 U3.2 U8.1 U9.1 U10.1 U11.1 | length 8207.9
  Top Layer w25: R4.2@1445,1527.67 1491.67,1527.67 1719,1755 v1(2603,1755) ; v1(1529,1074) 1530,1075 1586.79,1075 1655.39,1143.6 U8.1 ; U1.8@1617.24,3175.49 1617.54,3175.2 U1.8 1651.93,3175.2 1682.7,3205.97 1682.7,3247 ; U2.1 1626.1,3303.6 1682.7,3247 ; v1(1749,3247) 1682.7,3247 ; v1(2364,2367) 2368.78,2362.22 2368.78,2354.52 2419.9,2303.4 U11.1 2437.61,2303.4 2482.21,2348 2599.85,2348 2724.6,2223.25 2839.35,2108.5 v1(2952,2108.5) 3124,2280.5 v1(3124,2455) ; v1(2999,1368) 3000.62,1366.38 3081.3,1366.38 3081.6,1366.08 U9.1 ; v1(3658,2445) 3725.3,2445 3767.9,2402.4 U10.1
  Top Layer w50: C3.2 1125,1259.44 U3.2 v3@1125,1453.71 ; v3@1154.29,1483 1399.54,1483 1440.67,1524.13 1441.46,1524.13 1445,1527.67 1445,1356.52 1440,1351.52 J18.1
  Bottom Layer w25: J18.1 1440,1163 v1(1529,1074) ; v1(1749,3247) 1749,2982 v1(2364,2367) ; v1(2952,2108.5) 2952,2106.25 2603,1757.25 v1(2603,1755) 2612,1755 v1(2999,1368) ; v1(3124,2455) 3153.5,2484.5 3611.74,2484.5 3651.24,2445 v1(3658,2445)
  Bottom Layer w100: J12.5 J12.7 300,788 991,1479 v3(1142,1479)
Batt_current_filtered: C1.2 J4.1 R1.2 U2.3 | length 387.7
  Top Layer w25: U2.3 1701.2,3378.4 1709.03,3370.57 C1.2 1712.57,3372.15 1794.43,3372.15 R1.2 1930.72,3373.72 J4.1
Batt_current_raw: J3.1 R1.1 U1.7 | length 518.4
  Top Layer w25: U1.7 1630.57,3125.49 1694.67,3125.49 1796.5,3227.32 R1.1@1796.5,3315.78 ; R1.1 R1.1@1796.5,3315.78 ; J3.1 2009.86,3312.14 1800.14,3312.14 R1.1@1796.5,3315.78
BATT_GND: C1.1 C2.1 C3.1 C4.2 C7.1 C8.1 C9.1 C10.1 C11.2 C13.2 C14.2 C15.2 C16.2 C19.1 C20.1 C21.1 C22.1 C24.2 C25.2 C26.2 C27.2 C28.2 C29.1 C30.1 C31.1 C32.1 J12.2 J12.4 J12.6 J12.8 J24.1 J.2 P1.8 Q1.2 R3.1 R5.1 R10.1 R11.1 R12.1 R13.1 R18.1 R19.1 R20.1 R21.1 U1.5 U2.2 U3.1 U4.1 U5.1 U6.1 U7.1 U8.2 U9.2 U10.2 U11.2 | length 300.3
  Top Layer w50: U3.1 1025,1249.44 C3.1 1034.57,1106.41 1036.89,1104.09 1036.89,1086.37 1043.39,1079.87 C4.2
BATT_OUT: C4.1 C5.1 C6.1 C11.1 C15.1 C16.1 C17.1 C18.1 C24.1 C25.1 C28.1 U1.3 U1.4 U3.3 U4.7 U5.7 U6.7 U7.7 | length 3402.1
  Top Layer w50: C4.1 1199.02,1080 v2(1216,1080) ; C4.1@1225,1105.98 U3.3 ; v2(1474.15,1006.16) 1479,1001.3 1479,1000 1480.46,1000 C28.1 1714.72,856.46 C17.1 ; C17.1@1724.82,866 v1(1755.45,896.63) ; C25.1 3119.12,1036 3207.25,947.87 ; U4.7 U4.7@3568,2435 ; v1(3570,2437) U4.7@3568,2435 ; C16.1 v1(3641,2585.46) 3604.46,2585.46 3568,2549 U4.7@3568,2435
  Top Layer w75: v1(1755.45,896.63) 1833.25,896.63 ; U5.7@2265.12,2458.5 v1(2309.31,2502.69) 2401,2594.38 C6.1 v1(2571,2673.58) 2765.68,2673.58 2767.79,2671.47 C11.1@2809.13,2671.47 ; C15.1@2656.52,938.05 2656.52,956.18 2742,1041.66 C24.1 ; v1(2743.87,1039.79) 2850.66,933 3192.38,933 3207.25,947.87 ; C16.1@3704.05,2588.52 3708,2592.46 C5.1
  Top Layer w100: U1.4 U1.4@1410,3025
  Top Layer w125: 1410,2532 v1(1410,2750) v1(1410,2835) v1(1410,2915) v1(1410,2993) U1.4@1410,3025
  Bottom Layer w50: v2(1216,1080) 1224,1088 1392.3,1088 v2(1474.15,1006.16)
  other v1: 1409,2574 1411,2663 2814,2681
BATT_VCC: K1.B1 U1.1 U1.2 | length 600.7
  Top Layer w100: 1254,3130 1299.2,3175.2
  Top Layer w150: 1298,3174 1408.61,3174 U1.1
  Top Layer w200: K1.B1 1012,3130 1254,3130
BATT_VCC_IN: D1.1 J12.1 J12.3 J.1 K1.A1 K1.B2 | length 426
  Top Layer w50: D1.1@455.05,2034.46 463.51,2026 D1.1 479.26,1828.44 J.1
Current_SCL: J11.1 U2.5 | length 3247.3
  Top Layer w15: v1(1455,3304) 1455.4,3303.6 U2.5 U2.5@1520.16,3301
  Bottom Layer w15: J11.1 1091.14,750 1298.72,750 1597,1048.28 1597,1435.9 1711.5,1550.4 1711.5,2955.86 1704,2963.36 1704,3168 1568,3304 v1(1455,3304)
Current_SCL_1: J11.5 U10.5 | length 3707.3
  Top Layer w15: U10.5 3871.44,2402.2 3914.8,2402.2 v1(3915,2402)
  Bottom Layer w15: J11.5 1093.28,552.14 1242.85,552.14 3046.72,2356 3651,2356 3699,2404 3913,2404 v1(3915,2402)
Current_SCL_2: J11.3 U11.5 | length 2675.8
  Top Layer w15: v1(2497.95,2061.05) 2507.42,2061.05 2516.26,2052.21 2519.21,2052.21 2590,2123 2590,2294.61 2581.21,2303.4 U11.5
  Bottom Layer w15: J11.3 1089,647.86 1260.72,647.86 1289.86,677 1638,1025.14 1638,1420.33 1769.67,1552 2014.9,1552 2253.07,1790.18 2253.07,1816.18 v1(2497.95,2061.05)
Current_SCL_3: J11.7 U8.5 | length 1143.4
  Top Layer w15: J11.7 1089,352.14 1184.14,352.14 1377,545 1377,1001 1519.6,1143.6 U8.5
Current_SCL_4: J11.9 U9.5 | length 2562.7
  Top Layer w15: v1(2469.26,1246.45) 2469.26,1250.74 2469,1251 2485,1267 2836,1267 3028.24,1459.24 U9.5
  Top Layer w25: U9.5 U9.5@3081.6,1468.1
  Bottom Layer w15: J11.9 1089,347.86 1156.69,347.86 1389,580.17 1389,631.72 2003.73,1246.45 v1(2469.26,1246.45)
Current_SDA: J11.2 U2.4 | length 3218.7
  Top Layer w15: v1(1459,3379) 1522.16,3379 U2.4
  Bottom Layer w15: J11.2 1277,700 1618,1041 1618,1428.61 1731.5,1542.11 1731.5,2964.14 1724,2971.64 1724,3180 1525,3379 v1(1459,3379)
Current_SDA_1: J11.6 U10.4 | length 3580.6
  Top Layer w25: U10.4 3917.4,2327.6 v1(3918,2327)
  Bottom Layer w15: J11.6 1219,500 2086,1367 2087,1367 3047,2327 v1(3918,2327)
Current_SDA_2: J11.4 U11.4 | length 2440.8
  Top Layer w15: U11.4 2523.24,2148.76 v1(2524,2148)
  Bottom Layer w15: J11.4 1246,600 1659,1013 1659,1413.04 1776.96,1531 2028,1531 2561,2064 2561,2111 v1(2524,2148)
Current_SDA_3: J11.8 U8.4 | length 1001.1
  Top Layer w15: J11.8 1346,604.86 1346,1003.5 1560.9,1218.4 U8.4
Current_SDA_4: J11.10 U9.4 | length 2590.7
  Top Layer w15: v1(2364,1203) 2449.95,1288.95 2529.05,1288.95 2530,1288 2821,1288 3042,1509 3142,1509 3155,1496 3155,1460.65 U9.4
  Bottom Layer w15: J11.10 1411.64,570.5 1411.64,626.07 1988.57,1203 v1(2364,1203)
EN1: J10.1 P1.1 R8.1 R9.1 | length 3725.6
  Top Layer w15: v1(1545,1733) 1684,1872 2009,1872
  Top Layer w25: J10.1 1968,1913 2009,1872 3253,1872 3334.64,1953.64 3334.64,2063.89 3334,2064.54 R8.1
  Top Layer w50: R9.1 1964,2099.52 1965.51,2098 1965.51,1994.49 J10.1
  Bottom Layer w15: P1.1 1050.15,1300.15 1112.15,1300.15 v1(1545,1733)
EN2: J17.1 P1.2 R16.1 R17.1 | length 4111
  Top Layer w15: v1(1669,1568) 1998,1568 2104,1462 2104,1320 J17.1
  Top Layer w25: J17.1 2113,1311 2113,1172.72 R17.1 ; v1(2484,1690) 3358,1690 3510,1538 R16.1
  Bottom Layer w15: P1.2 843,993 844,993 1419,1568 v1(1669,1568)
  Bottom Layer w25: J17.1 v1(2484,1690)
filtered_sense_1: C31.2 J21.1 R24.2 U10.3 | length 294.6
  Top Layer w25: U10.3 3706.14,2327.6 3692.97,2314.43 C31.2 3689.03,2314.43 3684.8,2310.19 3684.8,2308.22 3681.72,2305.14 R24.2 3683.72,2230 3794,2230 J21.1
filtered_sense_2: C32.2 J23.1 R25.2 U11.3 | length 290.6
  Top Layer w25: R25.2 2403.3,2212 2419.9,2228.6 U11.3@2421.56,2228.6 ; J23.1 2421.27,2087.27 2421.27,2228.3 U11.3@2421.56,2228.6 ; U11.3 U11.3@2421.56,2228.6
filtered_sense_3: C29.2 J19.1 R22.2 U8.3 | length 268.8
  Top Layer w25: U8.3 C29.2@1742,1218.4 ; C29.2 C29.2@1742,1218.4 ; J19.1 C29.2@1742,1218.4 ; C29.2@1756.64,1211 R22.2
filtered_sense_4: C30.2 J20.1 R23.2 U9.3 | length 425
  Top Layer w25: R23.2 3217.28,1266.94 3204.42,1279.8 3163.81,1279.8 3159.57,1284.03 C30.2 3156.7,1288.88 3156.7,1364.46 U9.3 3156.4,1373.61 3265,1482.21 J20.1
H_B_sense_1: C7.2 J15.1 R10.2 R24.1 U4.6 | length 405.5
  Top Layer w25: U4.6 3521.25,2422.83 3521.25,2332.11 3548.38,2304.98 C7.2 3548.38,2245.02 3558,2235.4 R10.2 3558.72,2232.72 3623.57,2232.72 R24.1 3624.28,2169 3664,2129.28 J15.1
H_B_sense_2: C8.2 J16.1 R11.2 R25.1 U5.6 | length 424.6
  Top Layer w25: U5.6 2204,2336 2210.78,2329.22 2210.78,2304.85 2215.02,2300.62 C8.2@2216,2300.62 ; C8.2 2215.38,2236.78 2233.72,2218.44 2234.78,2218.44 2239.28,2213.94 R25.1 2237.43,2210.14 2237.43,2132.86 R11.2 2232.28,2127.72 2232.28,2021.28 J16.1
H_B_sense_3: C20.2 J13.1 R21.2 R22.1 U7.6 | length 401.4
  Top Layer w25: J13.1 1891.86,1322.14 1891.86,1213.86 R22.1 1894.72,1121.39 1889,1115.67 1889,1028 1901.75,1015.25 1901.75,938.17 U7.6
H_B_sense_4: C19.2 J14.1 R18.2 R23.1 U6.6 | length 406.3
  Top Layer w25: U6.6 3279,1046.2 3274.72,1050.48 R23.1 3274.72,1266.94 3343.51,1335.73 3359.73,1335.73 J14.1
IN1: J6.1 P1.4 R6.1 | length 3368.1
  Top Layer w15: P1.4 600,557 967.61,924.61 1237.65,1016.07 ccw(c1216,1080) 1264.87,1033.44 1679.43,1448 1717.72,1485 1973.5,1485 v1(1977,1488.5) ; v1(2675,2067) 2676,2066 3231,2066 J6.1
  Top Layer w25: J6.1 3232,2075.28 3264,2107.28 R6.1
  Bottom Layer w15: v1(1977,1488.5) 2017.5,1488.5 2314.08,1785.08 2393.08,1785.08 v1(2675,2067)
IN2: J7.1 P1.3 R7.1 | length 2564.1
  Top Layer w15: P1.3 844,894 844,1859 903,1918 1742,1918 J7.1
  Top Layer w50: J7.1 1822,2132.28 1851.29,2161.57 R7.1
IN3: J8.1 P1.5 R15.1 | length 2404.1
  Top Layer w15: P1.5 600,462.99 614.68,477.67 614.68,481.68 1037.61,904.61 1247.79,998.34 1252.14,1000.31 ccw(c1216,1080) 1279.17,1019.46 1687.72,1428 1702,1441 v1(1878,1441) ; v1(2142,1541) 2238,1445 J8.1
  Top Layer w25: R15.1 2208,1230 2236,1258 2236,1313 J8.1
  Bottom Layer w15: v1(1878,1441) 1883,1446 2047,1446 v1(2142,1541)
IN4: J9.1 P1.6 R14.1 | length 3892.5
  Top Layer w15: P1.6 605,350 1108,853 1141,853 1290.54,1002.54 ccw(c1216,1080) 1293.46,1005.46 1696,1408 1831.55,1408 1841.05,1398.5 1969.5,1398.5 1970,1399 1991.5,1399 v1(1992,1398.5) ; v1(2222,1598) 2223,1599 v1(3054,1599)
  Top Layer w25: R14.1 3580.94,1231.72 3683.22,1334 J9.1
  Bottom Layer w15: v1(1992,1398.5) 2059.6,1398.5 2222,1560.9 v1(2222,1598) ; v1(3054,1599) 3171,1599 3311,1459 3561,1459 J9.1
MOT1_A: C5.2 C13.1 J1.1 U4.4 U4.8 | length 1222.4
  Top Layer w50: U4.4 3418,2789 U4.8
  Top Layer w100: J1.1 2911.51,2862.78 2985.29,2789 3418,2789 3687,2789 3693,2783 3707,2783 3708,2782
MOT1_B: C6.2 C14.1 J1.2 U5.4 U5.8 | length 1237.2
  Top Layer w50: U5.4 U5.8
  Top Layer w100: 1823,2770 2063.24,2770 U5.8 2135.76,2779 2401,2779 2519.21,2779 2602.99,2862.78 J1.2
MOT2_A: C17.2 C26.1 J2.1 U7.4 U7.8 | length 1324
  Top Layer w50: U7.8@1879.8,680.2 1980,680.2 2005,705.2 U7.4
  Top Layer w100: 1719,756 1719,757 1722,754 1722,738.78 1780.58,680.2 U7.8@1879.8,680.2 ; U7.8 2027.64,555 2224.64,752 2484.96,752 2613.74,623.22 J2.1
MOT2_B: C18.2 C27.1 J2.2 U6.4 U6.8 | length 1377.3
  Top Layer w50: U6.4 U6.8 3520.35,747.58 C27.1
  Top Layer w100: J2.2 2918.59,632.08 2918.59,677.59 3057,816 3152,816 3231.17,736.83 3231.17,731.43 3356.36,606.24 U6.8
NetC2_2: C2.2 U1.6 | length 90.8
  Top Layer w25: U1.6 1651.93,3075.2 1654.5,3072.62 C2.2
NetC9_2: C9.2 R12.2 U4.5 | length 219.7
  Top Layer w25: U4.5 3467.8,2425.88 3467.8,2295.2 R12.2 3467.61,2222.15 3476.76,2213 C9.2
NetC10_2: C10.2 R13.2 U5.5 | length 223.3
  Top Layer w25: U5.5 2155.73,2429.11 2155.73,2210.73 C10.2
NetC21_2: C21.2 R20.2 U6.5 | length 254.5
  Top Layer w25: U6.5 3329,1115.65 3354.39,1141.05 R20.2 3355.2,1144.8 3355.2,1225.2 C21.2 C21.2@3358.46,1223.54
NetC22_2: C22.2 R19.2 U7.5 | length 209.1
  Top Layer w25: U7.5 1956.27,936.19 1956.27,1141.73 C22.2
NetD1_2: D1.2 K1.A2 Q1.3 | length 525.9
  Top Layer w50: D1.2 637.74,2025 Q1.3 ; D1.2@660.95,2050.21 733,2122.26 K1.A2
NetQ1_1: Q1.1 R2.2 R3.2 | length 160.9
  Top Layer w15: Q1.1 861.85,1989.08 1018.52,1989.08 R2.2
NetR4_1: R4.1 R5.2 U3.4 | length 383.1
  Top Layer w50: U3.4 1194.88,1752.51 1322.39,1625 1422.08,1625 1445,1602.08 R4.1@1445,1601.29
NetR6_2: R6.2 U4.2 | length 211.4
  Top Layer w25: R6.2 3264,2278 3314.75,2328.75 3314.75,2422.83 U4.2
NetR7_2: R7.2 U5.2 | length 293.4
  Top Layer w25: R7.2 1894,2259 1917,2282 1918,2281 1976,2281 2004,2309 U5.2
NetR8_2: R8.2 U4.3 | length 203.4
  Top Layer w25: R8.2 3337,2239.72 3337,2276 3368,2307 U4.3
NetR9_2: R9.2 U5.3 | length 250.5
  Top Layer w25: R9.2 1965.94,2218.72 2054,2306.78 U5.3
NetR14_2: R14.2 U6.2 | length 258.5
  Top Layer w25: U6.2 3482.25,989.41 3482.25,1071.25 3509,1098 3558.36,1098 3579,1118.64 R14.2
NetR15_2: R15.2 U7.2 | length 224.9
  Top Layer w25: U7.2 2108.25,938.17 2108.25,1019.25 2198.78,1109.78 R15.2@2210,1109.78
NetR16_2: R16.2 U6.3 | length 222.8
  Top Layer w25: U6.3 3432.25,989.41 3432.25,1076.25 3503.56,1147.56 3503.56,1169.78 3508.06,1174.28 R16.2
NetR17_2: R17.2 U7.3 | length 194
  Top Layer w25: U7.3 2055,1039.22 2117.06,1101.28 R17.2@2119,1101.28
RELAY_SIG: J5.1 P1.7 R2.1 | length 2454.5
  Top Layer w15: P1.7@587.01,250 P1.7 599.06,249.06 542.94,249.06 477,315 477,898 793,1214 793,1871 860,1938 1051,1938 J5.1 1166.28,2058.72 1022.72,2058.72 R2.1
pads on no net: J1.S1 J1.S2 J2.S1 J2.S2 J.S1 J.S2

## Polygon pours and split planes (outlines as drawn)
BATT_OUT on Bottom Layer "Bottom Layer-No Net 1" (solid, shelved, pour order 11): 754.77,4 3996,4 3996,3520 755,3520 755,6
BATT_VCC_IN on Bottom Layer "Bottom Layer-No Net" (solid, shelved, pour order 12): 9,9 736.27,9 737,9.73 737,3515 9,3515
BATT_GND on Top Layer "NONET_L01_P009" (solid, shelved, pour order 9): 0,0 0,3524 4000,3524 4000,0

## Keep-outs
Keep-Out Layer:
  the board outline again, w10

## Dimensions
4000,3524 to 0,3524 on Mechanical 1
0,0 to 4000,3524 on Mechanical 1

## Text inside footprints (layer, text, board x,y; h text height)
P1: Top Overlay "8" at 666.93,164.96 h40 r270; Top Overlay "1" at 666.93,854.72 h40 r270